# EAGLE board RTFM (EAGLE 9.3.2)
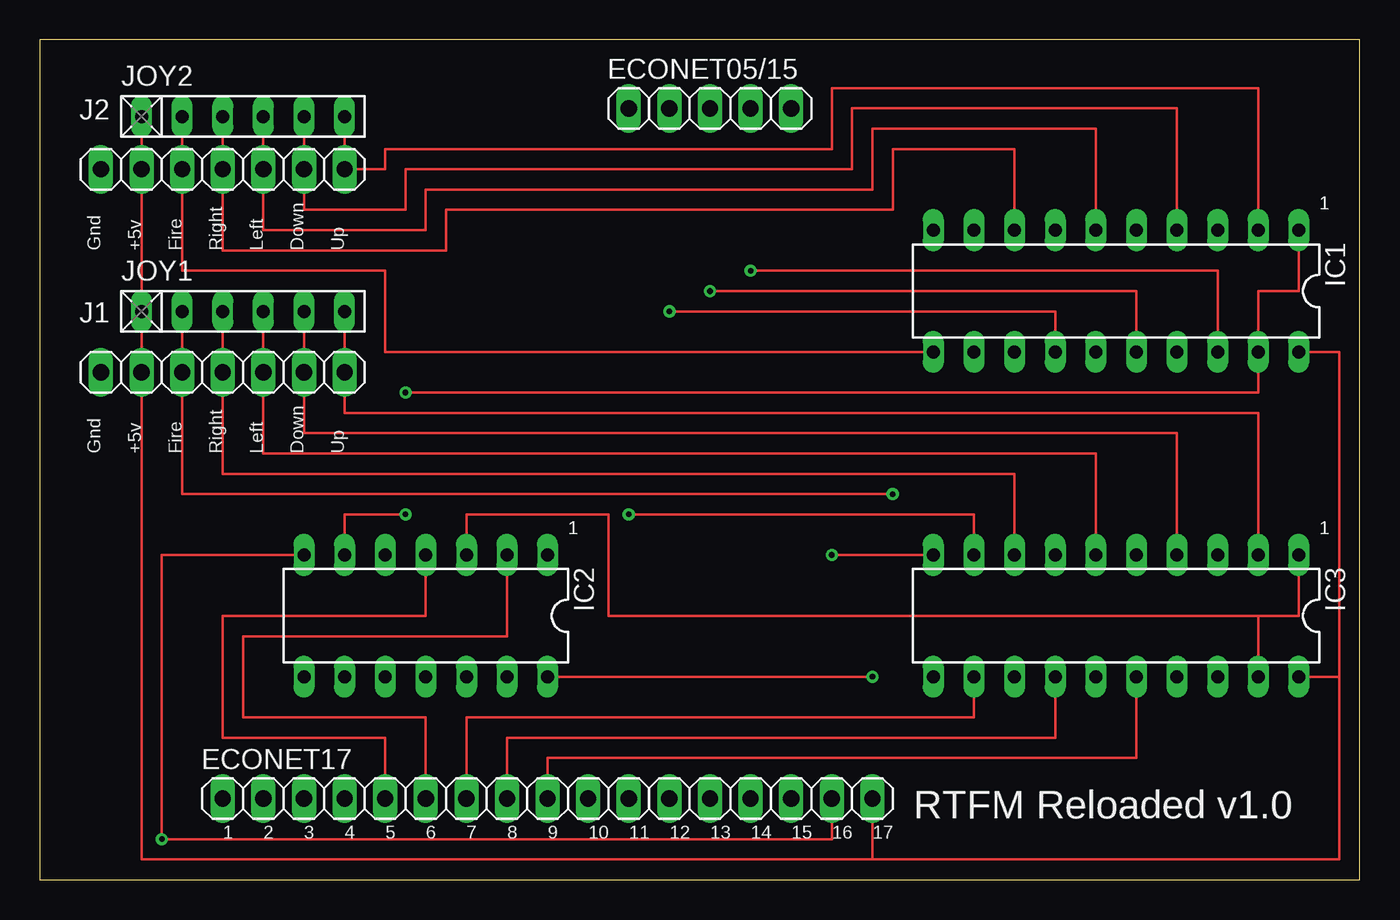
[diagram p0: board, top side]
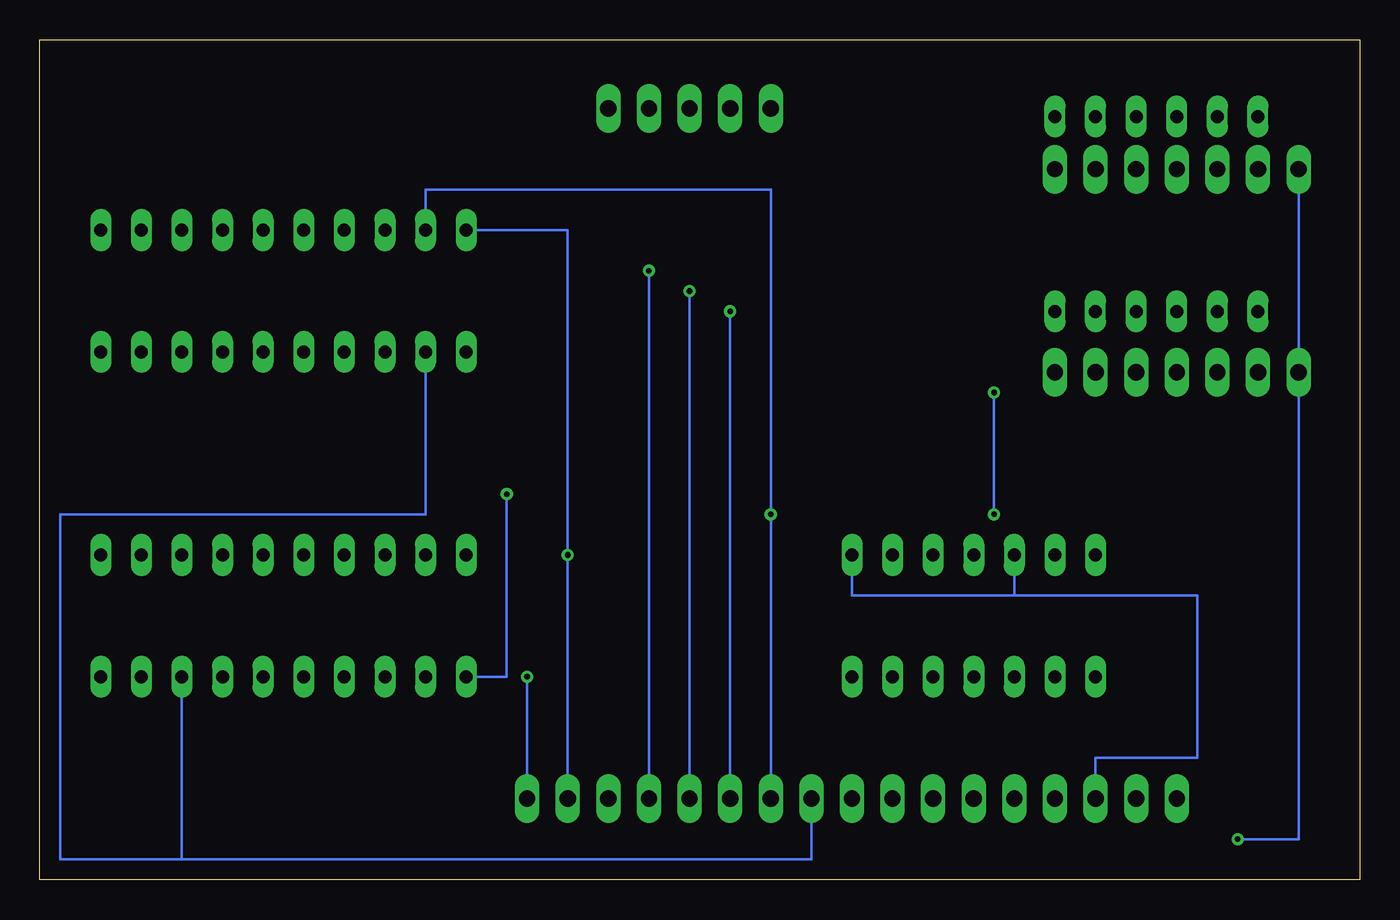
[diagram p1: board, bottom side, seen from below]

Size 82.54 x 52.54 mm. Coordinates in mm from the lower left corner, seen from the top.
Outline: 0,0 82.54,0 82.54,52.54 0,52.54 0,0
Copper layers (1*16): Top 0.035mm / dielectric 1.5mm / Bottom 0.035mm
Design rules "default": minimum track width 6mil, minimum drill 0.35mm, track to track 6mil, track to pad 6mil, pad to pad 6mil, via to via 6mil, smd to smd 6mil, copper to edge 40mil, drill to drill 6mil, minimum pad ring 10mil, minimum via ring 8mil, stop-mask expansion 4mil, vias tented up to drill 0mil, thermal gap 10mil

## Footprints (pad centres in the part's own frame; a part is rotated, then mirrored left to right if it is on the bottom)
1X05 = drill 1.016 long: 1 -5.08,0; 2 -2.54,0; 3 0,0; 4 2.54,0; 5 5.08,0
1X17 = drill 1.016 long: 1 -20.32,0; 2 -17.78,0; 3 -15.24,0; 4 -12.7,0; 5 -10.16,0; 6 -7.62,0; 7 -5.08,0; 8 -2.54,0; 9 0,0; 10 2.54,0; 11 5.08,0; 12 7.62,0; 13 10.16,0; 14 12.7,0; 15 15.24,0; 16 17.78,0; 17 20.32,0
DIL20 = drill 0.813 long: 1 -11.43,-3.81; 2 -8.89,-3.81; 3 -6.35,-3.81; 4 -3.81,-3.81; 5 -1.27,-3.81; 6 1.27,-3.81; 7 3.81,-3.81; 8 6.35,-3.81; 9 8.89,-3.81; 10 11.43,-3.81; 11 11.43,3.81; 12 8.89,3.81; 13 6.35,3.81; 14 3.81,3.81; 15 1.27,3.81; 16 -1.27,3.81; 17 -3.81,3.81; 18 -6.35,3.81; 19 -8.89,3.81; 20 -11.43,3.81
DIL14 = drill 0.813 long: 1 -7.62,-3.81; 2 -5.08,-3.81; 3 -2.54,-3.81; 4 0,-3.81; 5 2.54,-3.81; 6 5.08,-3.81; 7 7.62,-3.81; 8 7.62,3.81; 9 5.08,3.81; 10 2.54,3.81; 11 0,3.81; 12 -2.54,3.81; 13 -5.08,3.81; 14 -7.62,3.81
1X07 = drill 1.016 long: 1 -7.62,0; 2 -5.08,0; 3 -2.54,0; 4 0,0; 5 2.54,0; 6 5.08,0; 7 7.62,0
RN-6 = drill 0.813 long: 1 -6.35,0; 2 -3.81,0; 3 -1.27,0; 4 1.27,0; 5 3.81,0; 6 6.35,0

## Placement (x,y rotation side)
ECONET05/15  [1X05]  41.91,48.26 0 top
ECONET17  [1X17]  31.75,5.08 0 top
IC1  74LS240N  [DIL20]  67.31,36.83 180 top
IC2  74LS32N  [DIL14]  24.13,16.51 180 top
IC3  74LS240N  [DIL20]  67.31,16.51 180 top
J1  [1X07]  11.43,31.75 0 top
J2  [1X07]  11.43,44.45 0 top
JOY1  6x-1-102 1K  [RN-6]  12.7,35.56 0 top
JOY2  6x-1-102 1K  [RN-6]  12.7,47.75 0 top

## Library data of the parts
ECONET05/15 ECONET17 J1 J2 = pinhead
IC1-IC3 = 74xx-eu
JOY1 JOY2 = resistor-net; OC_FARNELL: unknown; OC_NEWARK: unknown

## Nets
N$1: ECONET17.3 IC2.1 IC2.5
N$2: ECONET17.5 IC2.4
N$3: ECONET17.6 IC2.2
N$4: IC1.1 IC1.19 IC2.6
N$5: ECONET17.16 IC1.10 IC2.7 IC3.10 J1.1 J2.1
N$6: ECONET17.7 IC3.12
N$7: ECONET17.8 IC3.14
N$8: ECONET17.9 IC3.16
N$9: ECONET17.10 IC1.12 IC3.18
N$10: ECONET17.11 IC1.9 IC3.9
N$11: ECONET17.12 IC1.14
N$12: ECONET17.13 IC1.16
N$13: ECONET17.14 IC1.18
N$14: ECONET17.17 IC1.20 IC2.14 IC3.20 J1.2 J2.2 JOY1.1 JOY2.1
N$16: IC3.4 J1.6 JOY1.5
N$17: IC3.6 J1.5 JOY1.4
N$18: IC3.8 J1.4 JOY1.3
N$19: IC3.2 J1.7 JOY1.6
N$20: IC1.2 J2.7 JOY2.6
N$21: IC1.4 J2.6 JOY2.5
N$22: IC1.6 J2.5 JOY2.4
N$23: IC1.8 J2.4 JOY2.3
N$24: IC1.11 J2.3 JOY2.2
N$25: IC2.3 IC3.1 IC3.19
N$32: IC3.11 J1.3 JOY1.2

## Tracks (layer width: path | path; a pad name or v marks a point on that pad's centre or on a via)
N$1
  Bottom 0.152: IC2.1 31.75,17.78 21.59,17.78 | ECONET17.3 16.51,7.62 10.16,7.62 10.16,17.78 21.59,17.78 | 21.59,17.78 IC2.5
N$2
  Top 0.152: IC2.4 24.13,16.51 11.43,16.51 11.43,8.89 21.59,8.89 ECONET17.5
N$3
  Top 0.152: IC2.2 29.21,15.24 12.7,15.24 12.7,10.16 24.13,10.16 ECONET17.6
N$4  (via drill 0.35)
  Top 0.152: IC1.1 78.74,36.83 76.2,36.83 IC1.19 76.2,30.48 v22.86,30.48 | IC2.6 19.05,22.86 v22.86,22.86
  Bottom 0.152: v22.86,22.86 v22.86,30.48
N$5  (via drill 0.35)
  Top 0.152: ECONET17.16 49.53,2.54 v7.62,2.54 7.62,20.32 IC2.7 | IC3.10 v49.53,20.32
  Bottom 0.152: v7.62,2.54 3.81,2.54 J1.1 J2.1 | ECONET17.16 v49.53,20.32 49.53,40.64 IC1.10
N$6
  Top 0.152: ECONET17.7 26.67,10.16 58.42,10.16 IC3.12
N$7
  Top 0.152: ECONET17.8 29.21,8.89 63.5,8.89 IC3.14
N$8
  Top 0.152: ECONET17.9 31.75,7.62 68.58,7.62 IC3.16
N$9
  Bottom 0.152: ECONET17.10 34.29,1.27 73.66,1.27 | 73.66,1.27 IC3.18 | IC1.12 58.42,22.86 81.28,22.86 81.28,1.27 73.66,1.27
N$10  (via drill 0.35)
  Top 0.152: v36.83,22.86 58.42,22.86 IC3.9
  Bottom 0.152: ECONET17.11 v36.83,22.86 36.83,43.18 58.42,43.18 IC1.9
N$11  (via drill 0.35)
  Top 0.152: v39.37,35.56 63.5,35.56 IC1.14
  Bottom 0.152: ECONET17.12 v39.37,35.56
N$12  (via drill 0.35)
  Top 0.152: v41.91,36.83 68.58,36.83 IC1.16
  Bottom 0.152: ECONET17.13 v41.91,36.83
N$13  (via drill 0.35)
  Top 0.152: v44.45,38.1 73.66,38.1 IC1.18
  Bottom 0.152: ECONET17.14 v44.45,38.1
N$14  (via drill 0.35)
  Top 0.152: JOY2.1 J2.2 JOY1.1 J1.2 6.35,1.27 52.07,1.27 | 52.07,1.27 ECONET17.17 | 81.28,12.7 81.28,1.27 52.07,1.27 | IC3.20 81.28,12.7 | 81.28,12.7 81.28,33.02 IC1.20 | v52.07,12.7 IC2.14
  Bottom 0.152: ECONET17.17 v52.07,12.7
N$16
  Top 0.152: JOY1.5 J1.6 16.51,27.94 71.12,27.94 IC3.4
N$17
  Top 0.152: JOY1.4 J1.5 13.97,26.67 66.04,26.67 IC3.6
N$18
  Top 0.152: JOY1.3 J1.4 11.43,25.4 60.96,25.4 IC3.8
N$19
  Top 0.152: JOY1.6 J1.7 19.05,29.21 76.2,29.21 IC3.2
N$20
  Top 0.152: JOY2.6 J2.7 21.59,44.45 21.59,45.72 49.53,45.72 49.53,49.53 76.2,49.53 IC1.2
N$21
  Top 0.152: JOY2.5 J2.6 16.51,41.91 22.86,41.91 22.86,44.45 50.8,44.45 50.8,48.26 71.12,48.26 IC1.4
N$22
  Top 0.152: JOY2.4 J2.5 13.97,40.64 24.13,40.64 24.13,43.18 52.07,43.18 52.07,46.99 66.04,46.99 IC1.6
N$23
  Top 0.152: JOY2.3 J2.4 11.43,39.37 25.4,39.37 25.4,41.91 53.34,41.91 53.34,45.72 60.96,45.72 IC1.8
N$24
  Top 0.152: JOY2.2 J2.3 8.89,38.1 21.59,38.1 21.59,33.02 IC1.11
N$25
  Top 0.152: IC2.3 26.67,22.86 35.56,22.86 35.56,16.51 76.2,16.51 | 76.2,16.51 78.74,16.51 IC3.1 | IC3.19 76.2,16.51
N$32  (via drill 0.35)
  Top 0.152: JOY1.2 J1.3 8.89,24.13 v53.34,24.13
  Bottom 0.152: IC3.11 53.34,12.7 v53.34,24.13

## Text on the board
tPlace: 1 | Gnd | +5v | Fire | Right | Left | Down | Up | Gnd | +5v | Fire | Right | Left | Down | Up | 1 | 1 | RTFM Reloaded v1.0 | 1 | 2 | 3 | 4 | 5 | 6 | 7 | 8 | 9 | 10 | 11 | 12 | 13 | 14 | 15 | 16 | 17